# Altium PCB Switch.PcbDoc
Units mil, origin at the board's own origin, x right, y up, seen from the top; angles counter-clockwise.
Board outline 575 x 1060 mil, 2 copper layers (Top Layer, Bottom Layer); 6 components, 2 nets, 8 pads, 0 vias.
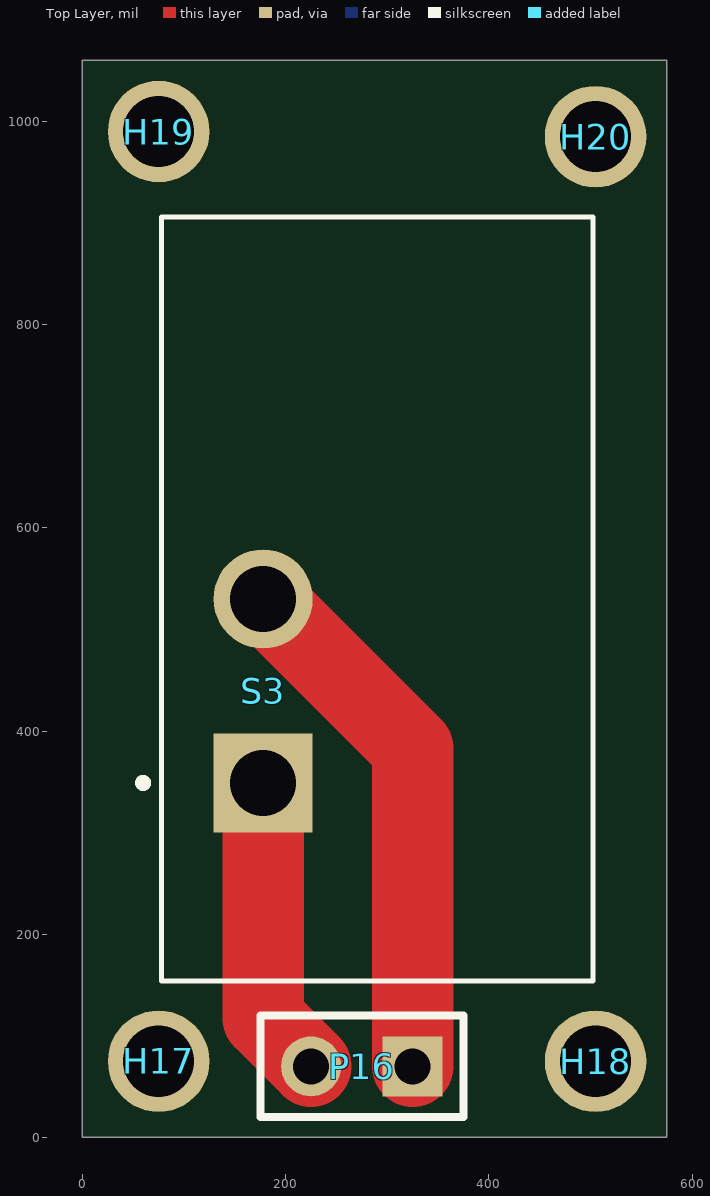
[diagram p0: Top Layer view]
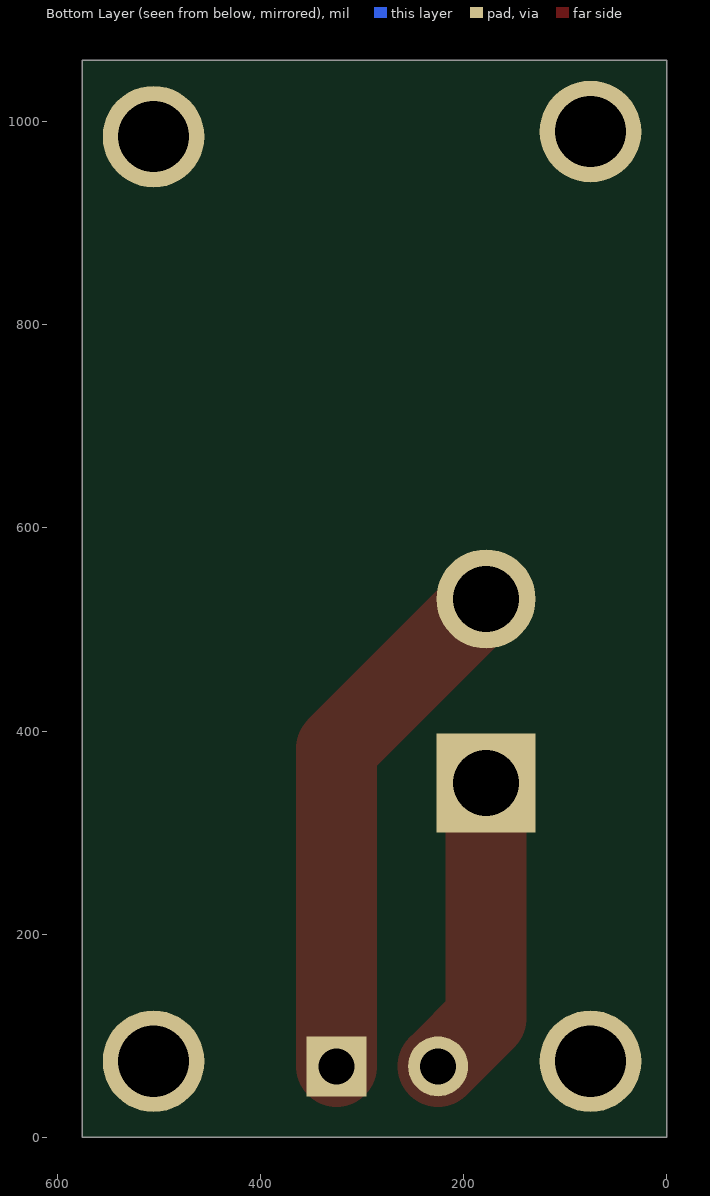
[diagram p1: Bottom Layer view, seen from below]

## Layer stack, top to bottom
Top Solder: solder mask 0.4, Solder Resist, Dk 3.5
Top Layer: signal copper 1.4
Dielectric 1: dielectric 12.6, FR-4, Dk 4.8
Bottom Layer: signal copper 1.4
Bottom Solder: solder mask 0.4, Solder Resist, Dk 3.5

## Board outline
0,0 0,1060 575,1060 575,0

## Design rules (kind name [scope] priority, off if disabled: settings)
Clearance [All] p1: gap=10 ignorepadtopadclearanceinfootprint=FALSE
PolygonConnect [All] p1: connectstyle=Relief reliefconductorwidth=10 reliefentries=4 polygonreliefangle="90 Angle" airgapwidth=10
RoutingVias [All] p1: holewidth=28 width=50 viastyle="Through Hole" minholewidth=28 minwidth=50 maxholewidth=28 maxwidth=50
SolderMaskExpansion [All] p1: expansion=4 istentingtop=FALSE
Width [All] p1: maxlimit=200 minlimit=10 preferedwidth=10 bottomlayer_maxwidth=10 minimp=50.000000 maximp=50.000000 favimp=50.000000
30 further rules are at their usual default settings.

## Components (designator, comment, footprint, x,y, rotation, side; value= is the part's Value field where it differs from the comment)
H17 "Hole 3mm" "Hole 3mm" 465,-100 r0 top
H18 "Hole 3mm" "Hole 3mm" 895,-100 r0 top
H19 "Hole 3mm" "Hole 3mm" 465,815 r0 top
H20 "Hole 3mm" "Hole 3mm" 895,810 r0 top
P16 "On/Off_LED" HDR1X2 325,70 r180 top
S3 "L101011MS02Q" SW_L101011MS02Q 290,530 r90 top

## Footprints (in the part's own frame and the unit in brackets; to place one, negate y for a bottom-side part, rotate by r counter-clockwise, add the part's x,y. Pads: shape width x height; smd on the part's side, far side on the other; paste and mask are expansions set on the pad)
HDR1X2 [mm] "Connector; Header; 2 Position"
  rect 1.5x1.5 hole 0.9: 1(0,0)
  round 1.5 hole 0.9: 2(2.54,0)
  silkscreen extent -1.27,-1.27 3.81,1.27
"Hole 3mm" [mil]
  round 100 hole 70: 1(-390,175)
SW_L101011MS02Q [mm]
  rect 2.48x2.48 hole 1.65: 1(-4.6,2.85)
  round 2.48 hole 1.65: 2(0,2.85)
  silkscreen extent -9.55,-5.4 9.55,5.95

## Part data
P16: library part "Header 2H", "Header, 2-Pin, Right Angle", LatestRevisionDate=17-Jul-2002, LatestRevisionNote="Re-released for DXP Platform.", Publisher="Altium Limited"
S3: "Slide Switch SPST Through Hole", Package=None, Availability=Unavailable, MF=C&K, MP=L101011MS02Q, Price=None, SnapEDA_Link=https://www.snapeda.com/parts/L101011MS02Q/C%26K/view-part/455586/?ref=snap

## Nets (pads, with @x,y where several pads share a name; then routed paths per layer and width w, separated by ;. In a path a pad name is that pad's centre, name@x,y a point inside that pad or via, vN(x,y) a via of type N, cw(c..) or ccw(c..) an arc to the next point about the centre after c; other vN are vias at no path point)
NetP16_1: P16.1 S3.2 | length 521
  Top Layer w80: S3.2 325,382.8 P16.1
NetP16_2: P16.2 S3.1 | length 298.5
  Top Layer w80: S3.1 177.8,117.2 P16.2
pads on no net: H17.1 H18.1 H19.1 H20.1

## Silkscreen, mask and mechanical layers (free items; w line width, h text height)
Mechanical 1:
  the board outline again, w10